# EAGLE board PCA9306_Breakout Panel v14 (EAGLE 6.4), part 1 of 3
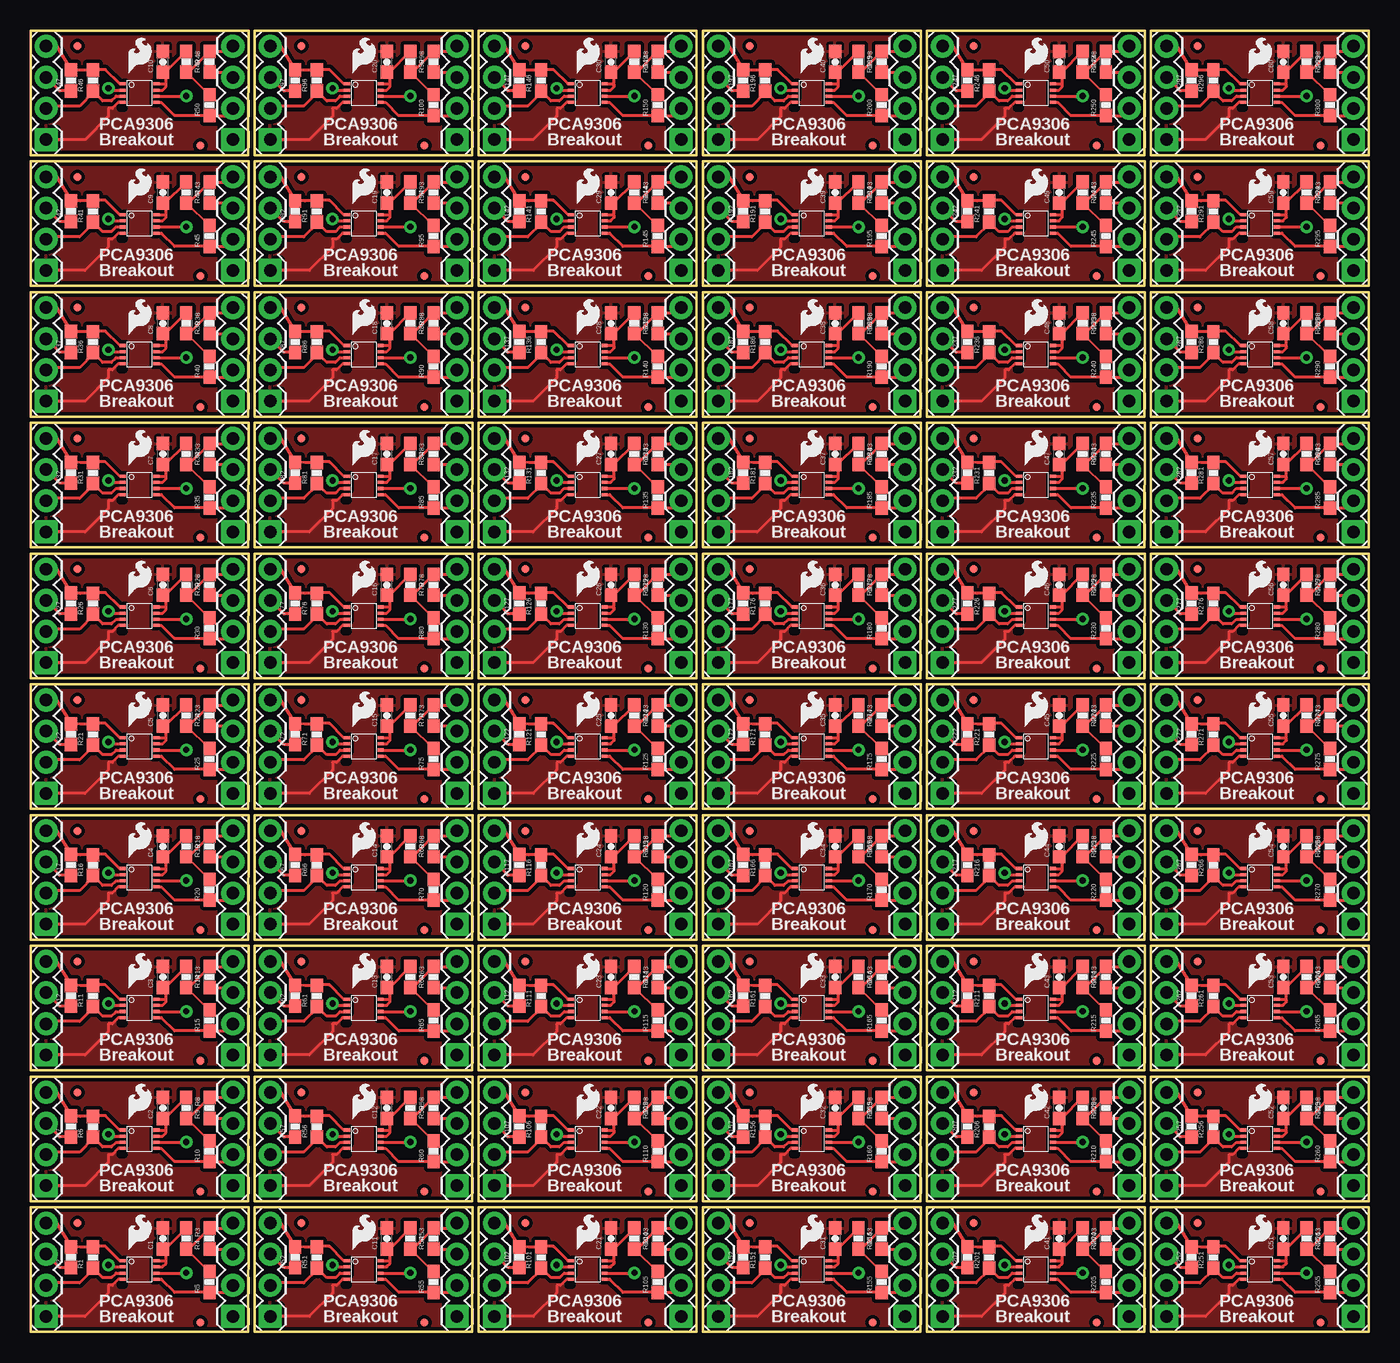
[diagram p0: board, top side]
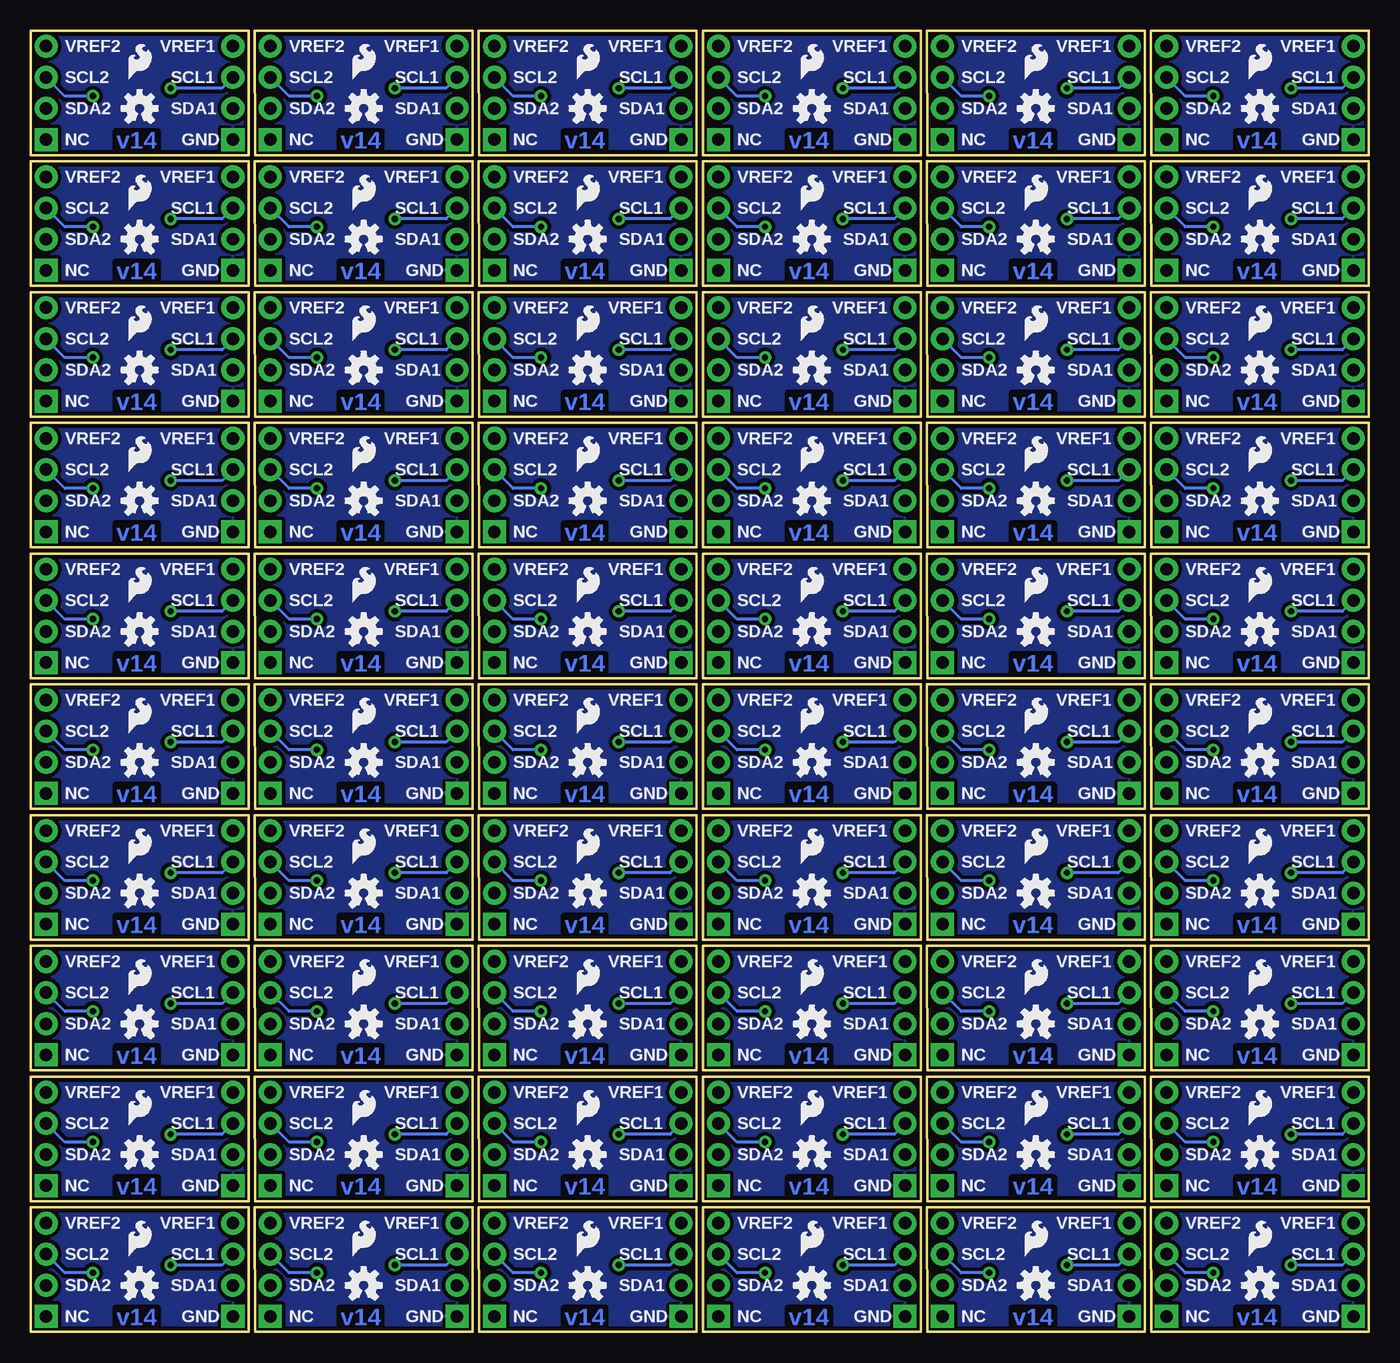
[diagram p1: board, bottom side, seen from below]

Size 109.22 x 106.17 mm. Coordinates in mm from the lower left corner, seen from the top.
Outline: 240 segments
Copper layers (1*16): Top 0.035mm / dielectric 1.5mm / Bottom 0.035mm
Design rules "SparkFun": minimum track width 8mil, minimum drill 20mil, track to track 8mil, track to pad 8mil, pad to pad 8mil, via to via 8mil, smd to smd 8mil, copper to edge 8mil, drill to drill 8mil, minimum pad ring 12mil, minimum via ring 10mil, stop-mask expansion 4mil, vias tented up to drill 20mil, thermal gap 10mil
tRestrict: area 7.3,3.8 to 7.6,4.1; area 7.3,14.5 to 7.6,14.8; area 7.3,25.1 to 7.6,25.5; area 7.3,35.8 to 7.6,36.1; area 7.3,46.5 to 7.6,46.8; area 7.3,57.2 to 7.6,57.5; area 7.3,67.8 to 7.6,68.1; area 7.3,78.5 to 7.6,78.8; area 7.3,89.2 to 7.6,89.5; area 7.3,99.8 to 7.6,100.1; area 25.6,3.8 to 25.9,4.1; area 25.6,14.5 to 25.9,14.8; 48 more areas

## Footprints (pad centres in the part's own frame; a part is rotated, then mirrored left to right if it is on the bottom)
0603-CAP = smd 1.1 x 1: 1 -0.85,0; 2 0.85,0
1X04 = drill 1.016 pad 1.88 square: 1 0,0 | drill 1.016 pad 1.88: 2 2.54,0; 3 5.08,0; 4 7.62,0
FIDUCIAL-1X2.5 = smd 0.635 x 0.635: 1 0,0
0603-RES = smd 1.1 x 1: 1 -0.85,0; 2 0.85,0
PSOP-8 = smd 0.25 x 0.5: 1 -0.73,-1.37; 2 -0.23,-1.37; 3 0.27,-1.37; 4 0.77,-1.37; 5 0.77,1.38; 6 0.27,1.38; 7 -0.23,1.38; 8 -0.73,1.38

## Placement (x,y rotation side)
C1  0.1uF  [0603-CAP]  10.79,7.62 90 top
C2  0.1uF  [0603-CAP]  10.79,18.29 90 top
C3  0.1uF  [0603-CAP]  10.79,28.96 90 top
C4  0.1uF  [0603-CAP]  10.79,39.62 90 top
C5  0.1uF  [0603-CAP]  10.79,50.29 90 top
C6  0.1uF  [0603-CAP]  10.79,60.96 90 top
C7  0.1uF  [0603-CAP]  10.79,71.63 90 top
C8  0.1uF  [0603-CAP]  10.79,82.3 90 top
C9  0.1uF  [0603-CAP]  10.79,92.96 90 top
C10  0.1uF  [0603-CAP]  10.79,103.63 90 top
C11  0.1uF  [0603-CAP]  29.08,7.62 90 top
C12  0.1uF  [0603-CAP]  29.08,18.29 90 top
C13  0.1uF  [0603-CAP]  29.08,28.96 90 top
C14  0.1uF  [0603-CAP]  29.08,39.62 90 top
C15  0.1uF  [0603-CAP]  29.08,50.29 90 top
C16  0.1uF  [0603-CAP]  29.08,60.96 90 top
C17  0.1uF  [0603-CAP]  29.08,71.63 90 top
C18  0.1uF  [0603-CAP]  29.08,82.3 90 top
C19  0.1uF  [0603-CAP]  29.08,92.96 90 top
C20  0.1uF  [0603-CAP]  29.08,103.63 90 top
C21  0.1uF  [0603-CAP]  47.37,7.62 90 top
C22  0.1uF  [0603-CAP]  47.37,18.29 90 top
C23  0.1uF  [0603-CAP]  47.37,28.96 90 top
C24  0.1uF  [0603-CAP]  47.37,39.62 90 top
C25  0.1uF  [0603-CAP]  47.37,50.29 90 top
C26  0.1uF  [0603-CAP]  47.37,60.96 90 top
C27  0.1uF  [0603-CAP]  47.37,71.63 90 top
C28  0.1uF  [0603-CAP]  47.37,82.3 90 top
C29  0.1uF  [0603-CAP]  47.37,92.96 90 top
C30  0.1uF  [0603-CAP]  47.37,103.63 90 top
C31  0.1uF  [0603-CAP]  65.66,7.62 90 top
C32  0.1uF  [0603-CAP]  65.66,18.29 90 top
C33  0.1uF  [0603-CAP]  65.66,28.96 90 top
C34  0.1uF  [0603-CAP]  65.66,39.62 90 top
C35  0.1uF  [0603-CAP]  65.66,50.29 90 top
C36  0.1uF  [0603-CAP]  65.66,60.96 90 top
C37  0.1uF  [0603-CAP]  65.66,71.63 90 top
C38  0.1uF  [0603-CAP]  65.66,82.3 90 top
C39  0.1uF  [0603-CAP]  65.66,92.96 90 top
C40  0.1uF  [0603-CAP]  65.66,103.63 90 top
C41  0.1uF  [0603-CAP]  83.95,7.62 90 top
C42  0.1uF  [0603-CAP]  83.95,18.29 90 top
C43  0.1uF  [0603-CAP]  83.95,28.96 90 top
C44  0.1uF  [0603-CAP]  83.95,39.62 90 top
C45  0.1uF  [0603-CAP]  83.95,50.29 90 top
C46  0.1uF  [0603-CAP]  83.95,60.96 90 top
C47  0.1uF  [0603-CAP]  83.95,71.63 90 top
C48  0.1uF  [0603-CAP]  83.95,82.3 90 top
C49  0.1uF  [0603-CAP]  83.95,92.96 90 top
C50  0.1uF  [0603-CAP]  83.95,103.63 90 top
C51  0.1uF  [0603-CAP]  102.23,7.62 90 top
C52  0.1uF  [0603-CAP]  102.23,18.29 90 top
C53  0.1uF  [0603-CAP]  102.23,28.96 90 top
C54  0.1uF  [0603-CAP]  102.23,39.62 90 top
C55  0.1uF  [0603-CAP]  102.23,50.29 90 top
C56  0.1uF  [0603-CAP]  102.23,60.96 90 top
C57  0.1uF  [0603-CAP]  102.23,71.63 90 top
C58  0.1uF  [0603-CAP]  102.23,82.3 90 top
C59  0.1uF  [0603-CAP]  102.23,92.96 90 top
C60  0.1uF  [0603-CAP]  102.23,103.63 90 top
JP1  [1X04]  1.27,1.27 90 top
JP2  [1X04]  16.51,1.27 90 top
JP3  LOGO-SFESK  [SFE-LOGO-FLAME]  8,6.73 0 top
JP4  LOGO-SFESK  [SFE-LOGO-FLAME]  9.78,6.22 0 bottom
JP5  [1X04]  1.27,11.94 90 top
JP6  [1X04]  16.51,11.94 90 top
JP7  FIDUCIAL1X2.5  [FIDUCIAL-1X2.5]  3.81,8.89 0 top
JP8  FIDUCIAL1X2.5  [FIDUCIAL-1X2.5]  13.84,0.79 0 top
JP9  LOGO-SFESK  [SFE-LOGO-FLAME]  8,17.4 0 top
JP10  LOGO-SFESK  [SFE-LOGO-FLAME]  9.78,16.89 0 bottom
JP11  FIDUCIAL1X2.5  [FIDUCIAL-1X2.5]  3.81,19.56 0 top
JP12  FIDUCIAL1X2.5  [FIDUCIAL-1X2.5]  13.84,11.46 0 top
JP13  [1X04]  1.27,22.61 90 top
JP14  [1X04]  16.51,22.61 90 top
JP15  LOGO-SFESK  [SFE-LOGO-FLAME]  8,28.07 0 top
JP16  LOGO-SFESK  [SFE-LOGO-FLAME]  9.78,27.56 0 bottom
JP17  FIDUCIAL1X2.5  [FIDUCIAL-1X2.5]  3.81,30.23 0 top
JP18  FIDUCIAL1X2.5  [FIDUCIAL-1X2.5]  13.84,22.13 0 top
JP19  [1X04]  1.27,33.27 90 top
JP20  [1X04]  16.51,33.27 90 top
JP21  LOGO-SFESK  [SFE-LOGO-FLAME]  8,38.73 0 top
JP22  LOGO-SFESK  [SFE-LOGO-FLAME]  9.78,38.23 0 bottom
JP23  FIDUCIAL1X2.5  [FIDUCIAL-1X2.5]  3.81,40.89 0 top
JP24  FIDUCIAL1X2.5  [FIDUCIAL-1X2.5]  13.84,32.8 0 top
JP25  [1X04]  1.27,43.94 90 top
JP26  [1X04]  16.51,43.94 90 top
JP27  LOGO-SFESK  [SFE-LOGO-FLAME]  8,49.4 0 top
JP28  LOGO-SFESK  [SFE-LOGO-FLAME]  9.78,48.9 0 bottom
JP29  FIDUCIAL1X2.5  [FIDUCIAL-1X2.5]  3.81,51.56 0 top
JP30  FIDUCIAL1X2.5  [FIDUCIAL-1X2.5]  13.84,43.47 0 top
JP31  [1X04]  1.27,54.61 90 top
JP32  [1X04]  16.51,54.61 90 top
JP33  LOGO-SFESK  [SFE-LOGO-FLAME]  8,60.07 0 top
JP34  LOGO-SFESK  [SFE-LOGO-FLAME]  9.78,59.56 0 bottom
JP35  FIDUCIAL1X2.5  [FIDUCIAL-1X2.5]  3.81,62.23 0 top
JP36  FIDUCIAL1X2.5  [FIDUCIAL-1X2.5]  13.84,54.13 0 top
JP37  [1X04]  1.27,65.28 90 top
JP38  [1X04]  16.51,65.28 90 top
JP39  LOGO-SFESK  [SFE-LOGO-FLAME]  8,70.74 0 top
JP40  LOGO-SFESK  [SFE-LOGO-FLAME]  9.78,70.23 0 bottom
JP41  FIDUCIAL1X2.5  [FIDUCIAL-1X2.5]  3.81,72.9 0 top
JP42  FIDUCIAL1X2.5  [FIDUCIAL-1X2.5]  13.84,64.8 0 top
JP43  [1X04]  1.27,75.95 90 top
JP44  [1X04]  16.51,75.95 90 top
JP45  LOGO-SFESK  [SFE-LOGO-FLAME]  8,81.41 0 top
JP46  LOGO-SFESK  [SFE-LOGO-FLAME]  9.78,80.9 0 bottom
JP47  FIDUCIAL1X2.5  [FIDUCIAL-1X2.5]  3.81,83.57 0 top
JP48  FIDUCIAL1X2.5  [FIDUCIAL-1X2.5]  13.84,75.47 0 top
JP49  [1X04]  1.27,86.61 90 top
JP50  [1X04]  16.51,86.61 90 top
JP51  LOGO-SFESK  [SFE-LOGO-FLAME]  8,92.08 0 top
JP52  LOGO-SFESK  [SFE-LOGO-FLAME]  9.78,91.57 0 bottom
JP53  FIDUCIAL1X2.5  [FIDUCIAL-1X2.5]  3.81,94.23 0 top
JP54  FIDUCIAL1X2.5  [FIDUCIAL-1X2.5]  13.84,86.14 0 top
JP55  [1X04]  1.27,97.28 90 top
JP56  [1X04]  16.51,97.28 90 top
JP57  LOGO-SFESK  [SFE-LOGO-FLAME]  8,102.74 0 top
JP58  LOGO-SFESK  [SFE-LOGO-FLAME]  9.78,102.23 0 bottom
JP59  FIDUCIAL1X2.5  [FIDUCIAL-1X2.5]  3.81,104.9 0 top
JP60  FIDUCIAL1X2.5  [FIDUCIAL-1X2.5]  13.84,96.81 0 top
JP61  [1X04]  19.56,1.27 90 top
JP62  [1X04]  34.8,1.27 90 top
JP63  LOGO-SFESK  [SFE-LOGO-FLAME]  26.29,6.73 0 top
JP64  LOGO-SFESK  [SFE-LOGO-FLAME]  28.07,6.22 0 bottom
JP65  FIDUCIAL1X2.5  [FIDUCIAL-1X2.5]  22.1,8.89 0 top
JP66  FIDUCIAL1X2.5  [FIDUCIAL-1X2.5]  32.13,0.79 0 top
JP67  [1X04]  19.56,11.94 90 top
JP68  [1X04]  34.8,11.94 90 top
JP69  LOGO-SFESK  [SFE-LOGO-FLAME]  26.29,17.4 0 top
JP70  LOGO-SFESK  [SFE-LOGO-FLAME]  28.07,16.89 0 bottom
JP71  FIDUCIAL1X2.5  [FIDUCIAL-1X2.5]  22.1,19.56 0 top
JP72  FIDUCIAL1X2.5  [FIDUCIAL-1X2.5]  32.13,11.46 0 top
JP73  [1X04]  19.56,22.61 90 top
JP74  [1X04]  34.8,22.61 90 top
JP75  LOGO-SFESK  [SFE-LOGO-FLAME]  26.29,28.07 0 top
JP76  LOGO-SFESK  [SFE-LOGO-FLAME]  28.07,27.56 0 bottom
JP77  FIDUCIAL1X2.5  [FIDUCIAL-1X2.5]  22.1,30.23 0 top
JP78  FIDUCIAL1X2.5  [FIDUCIAL-1X2.5]  32.13,22.13 0 top
JP79  [1X04]  19.56,33.27 90 top
JP80  [1X04]  34.8,33.27 90 top
JP81  LOGO-SFESK  [SFE-LOGO-FLAME]  26.29,38.73 0 top
JP82  LOGO-SFESK  [SFE-LOGO-FLAME]  28.07,38.23 0 bottom
JP83  FIDUCIAL1X2.5  [FIDUCIAL-1X2.5]  22.1,40.89 0 top
JP84  FIDUCIAL1X2.5  [FIDUCIAL-1X2.5]  32.13,32.8 0 top
JP85  [1X04]  19.56,43.94 90 top
JP86  [1X04]  34.8,43.94 90 top
JP87  LOGO-SFESK  [SFE-LOGO-FLAME]  26.29,49.4 0 top
JP88  LOGO-SFESK  [SFE-LOGO-FLAME]  28.07,48.9 0 bottom
JP89  FIDUCIAL1X2.5  [FIDUCIAL-1X2.5]  22.1,51.56 0 top
JP90  FIDUCIAL1X2.5  [FIDUCIAL-1X2.5]  32.13,43.47 0 top
JP91  [1X04]  19.56,54.61 90 top
JP92  [1X04]  34.8,54.61 90 top
JP93  LOGO-SFESK  [SFE-LOGO-FLAME]  26.29,60.07 0 top
JP94  LOGO-SFESK  [SFE-LOGO-FLAME]  28.07,59.56 0 bottom
JP95  FIDUCIAL1X2.5  [FIDUCIAL-1X2.5]  22.1,62.23 0 top
JP96  FIDUCIAL1X2.5  [FIDUCIAL-1X2.5]  32.13,54.13 0 top
JP97  [1X04]  19.56,65.28 90 top
JP98  [1X04]  34.8,65.28 90 top
JP99  LOGO-SFESK  [SFE-LOGO-FLAME]  26.29,70.74 0 top
JP100  LOGO-SFESK  [SFE-LOGO-FLAME]  28.07,70.23 0 bottom
JP101  FIDUCIAL1X2.5  [FIDUCIAL-1X2.5]  22.1,72.9 0 top
JP102  FIDUCIAL1X2.5  [FIDUCIAL-1X2.5]  32.13,64.8 0 top
JP103  [1X04]  19.56,75.95 90 top
JP104  [1X04]  34.8,75.95 90 top
JP105  LOGO-SFESK  [SFE-LOGO-FLAME]  26.29,81.41 0 top
JP106  LOGO-SFESK  [SFE-LOGO-FLAME]  28.07,80.9 0 bottom
JP107  FIDUCIAL1X2.5  [FIDUCIAL-1X2.5]  22.1,83.57 0 top
JP108  FIDUCIAL1X2.5  [FIDUCIAL-1X2.5]  32.13,75.47 0 top
JP109  [1X04]  19.56,86.61 90 top
JP110  [1X04]  34.8,86.61 90 top
JP111  LOGO-SFESK  [SFE-LOGO-FLAME]  26.29,92.08 0 top
JP112  LOGO-SFESK  [SFE-LOGO-FLAME]  28.07,91.57 0 bottom
JP113  FIDUCIAL1X2.5  [FIDUCIAL-1X2.5]  22.1,94.23 0 top
JP114  FIDUCIAL1X2.5  [FIDUCIAL-1X2.5]  32.13,86.14 0 top
JP115  [1X04]  19.56,97.28 90 top
JP116  [1X04]  34.8,97.28 90 top
JP117  LOGO-SFESK  [SFE-LOGO-FLAME]  26.29,102.74 0 top
JP118  LOGO-SFESK  [SFE-LOGO-FLAME]  28.07,102.23 0 bottom
JP119  FIDUCIAL1X2.5  [FIDUCIAL-1X2.5]  22.1,104.9 0 top
JP120  FIDUCIAL1X2.5  [FIDUCIAL-1X2.5]  32.13,96.81 0 top
JP121  [1X04]  37.85,1.27 90 top
JP122  [1X04]  53.09,1.27 90 top
JP123  LOGO-SFESK  [SFE-LOGO-FLAME]  44.58,6.73 0 top
JP124  LOGO-SFESK  [SFE-LOGO-FLAME]  46.35,6.22 0 bottom
JP125  FIDUCIAL1X2.5  [FIDUCIAL-1X2.5]  40.39,8.89 0 top
JP126  FIDUCIAL1X2.5  [FIDUCIAL-1X2.5]  50.42,0.79 0 top
JP127  [1X04]  37.85,11.94 90 top
JP128  [1X04]  53.09,11.94 90 top
JP129  LOGO-SFESK  [SFE-LOGO-FLAME]  44.58,17.4 0 top
JP130  LOGO-SFESK  [SFE-LOGO-FLAME]  46.35,16.89 0 bottom
JP131  FIDUCIAL1X2.5  [FIDUCIAL-1X2.5]  40.39,19.56 0 top
JP132  FIDUCIAL1X2.5  [FIDUCIAL-1X2.5]  50.42,11.46 0 top
JP133  [1X04]  37.85,22.61 90 top
JP134  [1X04]  53.09,22.61 90 top
JP135  LOGO-SFESK  [SFE-LOGO-FLAME]  44.58,28.07 0 top
JP136  LOGO-SFESK  [SFE-LOGO-FLAME]  46.35,27.56 0 bottom
JP137  FIDUCIAL1X2.5  [FIDUCIAL-1X2.5]  40.39,30.23 0 top
JP138  FIDUCIAL1X2.5  [FIDUCIAL-1X2.5]  50.42,22.13 0 top
JP139  [1X04]  37.85,33.27 90 top
JP140  [1X04]  53.09,33.27 90 top
JP141  LOGO-SFESK  [SFE-LOGO-FLAME]  44.58,38.73 0 top
JP142  LOGO-SFESK  [SFE-LOGO-FLAME]  46.35,38.23 0 bottom
JP143  FIDUCIAL1X2.5  [FIDUCIAL-1X2.5]  40.39,40.89 0 top
JP144  FIDUCIAL1X2.5  [FIDUCIAL-1X2.5]  50.42,32.8 0 top
JP145  [1X04]  37.85,43.94 90 top
JP146  [1X04]  53.09,43.94 90 top
JP147  LOGO-SFESK  [SFE-LOGO-FLAME]  44.58,49.4 0 top
JP148  LOGO-SFESK  [SFE-LOGO-FLAME]  46.35,48.9 0 bottom
JP149  FIDUCIAL1X2.5  [FIDUCIAL-1X2.5]  40.39,51.56 0 top
JP150  FIDUCIAL1X2.5  [FIDUCIAL-1X2.5]  50.42,43.47 0 top
JP151  [1X04]  37.85,54.61 90 top
JP152  [1X04]  53.09,54.61 90 top
JP153  LOGO-SFESK  [SFE-LOGO-FLAME]  44.58,60.07 0 top
JP154  LOGO-SFESK  [SFE-LOGO-FLAME]  46.35,59.56 0 bottom
JP155  FIDUCIAL1X2.5  [FIDUCIAL-1X2.5]  40.39,62.23 0 top
JP156  FIDUCIAL1X2.5  [FIDUCIAL-1X2.5]  50.42,54.13 0 top
JP157  [1X04]  37.85,65.28 90 top
JP158  [1X04]  53.09,65.28 90 top
JP159  LOGO-SFESK  [SFE-LOGO-FLAME]  44.58,70.74 0 top
JP160  LOGO-SFESK  [SFE-LOGO-FLAME]  46.35,70.23 0 bottom
JP161  FIDUCIAL1X2.5  [FIDUCIAL-1X2.5]  40.39,72.9 0 top
JP162  FIDUCIAL1X2.5  [FIDUCIAL-1X2.5]  50.42,64.8 0 top
JP163  [1X04]  37.85,75.95 90 top
JP164  [1X04]  53.09,75.95 90 top
JP165  LOGO-SFESK  [SFE-LOGO-FLAME]  44.58,81.41 0 top
JP166  LOGO-SFESK  [SFE-LOGO-FLAME]  46.35,80.9 0 bottom
JP167  FIDUCIAL1X2.5  [FIDUCIAL-1X2.5]  40.39,83.57 0 top
JP168  FIDUCIAL1X2.5  [FIDUCIAL-1X2.5]  50.42,75.47 0 top
JP169  [1X04]  37.85,86.61 90 top
JP170  [1X04]  53.09,86.61 90 top
JP171  LOGO-SFESK  [SFE-LOGO-FLAME]  44.58,92.08 0 top
JP172  LOGO-SFESK  [SFE-LOGO-FLAME]  46.35,91.57 0 bottom
JP173  FIDUCIAL1X2.5  [FIDUCIAL-1X2.5]  40.39,94.23 0 top
JP174  FIDUCIAL1X2.5  [FIDUCIAL-1X2.5]  50.42,86.14 0 top
JP175  [1X04]  37.85,97.28 90 top
JP176  [1X04]  53.09,97.28 90 top
JP177  LOGO-SFESK  [SFE-LOGO-FLAME]  44.58,102.74 0 top
JP178  LOGO-SFESK  [SFE-LOGO-FLAME]  46.35,102.23 0 bottom
JP179  FIDUCIAL1X2.5  [FIDUCIAL-1X2.5]  40.39,104.9 0 top
JP180  FIDUCIAL1X2.5  [FIDUCIAL-1X2.5]  50.42,96.81 0 top
JP181  [1X04]  56.13,1.27 90 top
JP182  [1X04]  71.37,1.27 90 top
JP183  LOGO-SFESK  [SFE-LOGO-FLAME]  62.87,6.73 0 top
JP184  LOGO-SFESK  [SFE-LOGO-FLAME]  64.64,6.22 0 bottom
JP185  FIDUCIAL1X2.5  [FIDUCIAL-1X2.5]  58.67,8.89 0 top
JP186  FIDUCIAL1X2.5  [FIDUCIAL-1X2.5]  68.71,0.79 0 top
JP187  [1X04]  56.13,11.94 90 top
JP188  [1X04]  71.37,11.94 90 top
JP189  LOGO-SFESK  [SFE-LOGO-FLAME]  62.87,17.4 0 top
JP190  LOGO-SFESK  [SFE-LOGO-FLAME]  64.64,16.89 0 bottom
JP191  FIDUCIAL1X2.5  [FIDUCIAL-1X2.5]  58.67,19.56 0 top
JP192  FIDUCIAL1X2.5  [FIDUCIAL-1X2.5]  68.71,11.46 0 top
JP193  [1X04]  56.13,22.61 90 top
JP194  [1X04]  71.37,22.61 90 top
JP195  LOGO-SFESK  [SFE-LOGO-FLAME]  62.87,28.07 0 top
JP196  LOGO-SFESK  [SFE-LOGO-FLAME]  64.64,27.56 0 bottom
JP197  FIDUCIAL1X2.5  [FIDUCIAL-1X2.5]  58.67,30.23 0 top
JP198  FIDUCIAL1X2.5  [FIDUCIAL-1X2.5]  68.71,22.13 0 top
JP199  [1X04]  56.13,33.27 90 top
JP200  [1X04]  71.37,33.27 90 top
JP201  LOGO-SFESK  [SFE-LOGO-FLAME]  62.87,38.73 0 top
JP202  LOGO-SFESK  [SFE-LOGO-FLAME]  64.64,38.23 0 bottom
JP203  FIDUCIAL1X2.5  [FIDUCIAL-1X2.5]  58.67,40.89 0 top
JP204  FIDUCIAL1X2.5  [FIDUCIAL-1X2.5]  68.71,32.8 0 top
JP205  [1X04]  56.13,43.94 90 top
JP206  [1X04]  71.37,43.94 90 top
JP207  LOGO-SFESK  [SFE-LOGO-FLAME]  62.87,49.4 0 top
JP208  LOGO-SFESK  [SFE-LOGO-FLAME]  64.64,48.9 0 bottom
JP209  FIDUCIAL1X2.5  [FIDUCIAL-1X2.5]  58.67,51.56 0 top
JP210  FIDUCIAL1X2.5  [FIDUCIAL-1X2.5]  68.71,43.47 0 top
JP211  [1X04]  56.13,54.61 90 top
JP212  [1X04]  71.37,54.61 90 top
JP213  LOGO-SFESK  [SFE-LOGO-FLAME]  62.87,60.07 0 top
JP214  LOGO-SFESK  [SFE-LOGO-FLAME]  64.64,59.56 0 bottom
JP215  FIDUCIAL1X2.5  [FIDUCIAL-1X2.5]  58.67,62.23 0 top
JP216  FIDUCIAL1X2.5  [FIDUCIAL-1X2.5]  68.71,54.13 0 top
JP217  [1X04]  56.13,65.28 90 top
JP218  [1X04]  71.37,65.28 90 top
JP219  LOGO-SFESK  [SFE-LOGO-FLAME]  62.87,70.74 0 top
JP220  LOGO-SFESK  [SFE-LOGO-FLAME]  64.64,70.23 0 bottom
JP221  FIDUCIAL1X2.5  [FIDUCIAL-1X2.5]  58.67,72.9 0 top
JP222  FIDUCIAL1X2.5  [FIDUCIAL-1X2.5]  68.71,64.8 0 top
JP223  [1X04]  56.13,75.95 90 top
JP224  [1X04]  71.37,75.95 90 top
JP225  LOGO-SFESK  [SFE-LOGO-FLAME]  62.87,81.41 0 top
JP226  LOGO-SFESK  [SFE-LOGO-FLAME]  64.64,80.9 0 bottom
JP227  FIDUCIAL1X2.5  [FIDUCIAL-1X2.5]  58.67,83.57 0 top
JP228  FIDUCIAL1X2.5  [FIDUCIAL-1X2.5]  68.71,75.47 0 top
JP229  [1X04]  56.13,86.61 90 top
JP230  [1X04]  71.37,86.61 90 top
JP231  LOGO-SFESK  [SFE-LOGO-FLAME]  62.87,92.08 0 top
JP232  LOGO-SFESK  [SFE-LOGO-FLAME]  64.64,91.57 0 bottom
JP233  FIDUCIAL1X2.5  [FIDUCIAL-1X2.5]  58.67,94.23 0 top
JP234  FIDUCIAL1X2.5  [FIDUCIAL-1X2.5]  68.71,86.14 0 top
JP235  [1X04]  56.13,97.28 90 top
JP236  [1X04]  71.37,97.28 90 top
JP237  LOGO-SFESK  [SFE-LOGO-FLAME]  62.87,102.74 0 top
JP238  LOGO-SFESK  [SFE-LOGO-FLAME]  64.64,102.23 0 bottom
JP239  FIDUCIAL1X2.5  [FIDUCIAL-1X2.5]  58.67,104.9 0 top
JP240  FIDUCIAL1X2.5  [FIDUCIAL-1X2.5]  68.71,96.81 0 top
JP241  [1X04]  74.42,1.27 90 top
JP242  [1X04]  89.66,1.27 90 top
JP243  LOGO-SFESK  [SFE-LOGO-FLAME]  81.15,6.73 0 top
JP244  LOGO-SFESK  [SFE-LOGO-FLAME]  82.93,6.22 0 bottom
JP245  FIDUCIAL1X2.5  [FIDUCIAL-1X2.5]  76.96,8.89 0 top
JP246  FIDUCIAL1X2.5  [FIDUCIAL-1X2.5]  87,0.79 0 top
JP247  [1X04]  74.42,11.94 90 top
JP248  [1X04]  89.66,11.94 90 top
JP249  LOGO-SFESK  [SFE-LOGO-FLAME]  81.15,17.4 0 top
JP250  LOGO-SFESK  [SFE-LOGO-FLAME]  82.93,16.89 0 bottom
JP251  FIDUCIAL1X2.5  [FIDUCIAL-1X2.5]  76.96,19.56 0 top
JP252  FIDUCIAL1X2.5  [FIDUCIAL-1X2.5]  87,11.46 0 top
JP253  [1X04]  74.42,22.61 90 top
JP254  [1X04]  89.66,22.61 90 top
JP255  LOGO-SFESK  [SFE-LOGO-FLAME]  81.15,28.07 0 top
JP256  LOGO-SFESK  [SFE-LOGO-FLAME]  82.93,27.56 0 bottom
JP257  FIDUCIAL1X2.5  [FIDUCIAL-1X2.5]  76.96,30.23 0 top
JP258  FIDUCIAL1X2.5  [FIDUCIAL-1X2.5]  87,22.13 0 top
JP259  [1X04]  74.42,33.27 90 top
JP260  [1X04]  89.66,33.27 90 top
JP261  LOGO-SFESK  [SFE-LOGO-FLAME]  81.15,38.73 0 top
JP262  LOGO-SFESK  [SFE-LOGO-FLAME]  82.93,38.23 0 bottom
JP263  FIDUCIAL1X2.5  [FIDUCIAL-1X2.5]  76.96,40.89 0 top
JP264  FIDUCIAL1X2.5  [FIDUCIAL-1X2.5]  87,32.8 0 top
JP265  [1X04]  74.42,43.94 90 top
JP266  [1X04]  89.66,43.94 90 top
JP267  LOGO-SFESK  [SFE-LOGO-FLAME]  81.15,49.4 0 top
JP268  LOGO-SFESK  [SFE-LOGO-FLAME]  82.93,48.9 0 bottom
JP269  FIDUCIAL1X2.5  [FIDUCIAL-1X2.5]  76.96,51.56 0 top
JP270  FIDUCIAL1X2.5  [FIDUCIAL-1X2.5]  87,43.47 0 top
JP271  [1X04]  74.42,54.61 90 top
JP272  [1X04]  89.66,54.61 90 top
JP273  LOGO-SFESK  [SFE-LOGO-FLAME]  81.15,60.07 0 top
JP274  LOGO-SFESK  [SFE-LOGO-FLAME]  82.93,59.56 0 bottom
JP275  FIDUCIAL1X2.5  [FIDUCIAL-1X2.5]  76.96,62.23 0 top
JP276  FIDUCIAL1X2.5  [FIDUCIAL-1X2.5]  87,54.13 0 top
JP277  [1X04]  74.42,65.28 90 top
JP278  [1X04]  89.66,65.28 90 top
JP279  LOGO-SFESK  [SFE-LOGO-FLAME]  81.15,70.74 0 top
JP280  LOGO-SFESK  [SFE-LOGO-FLAME]  82.93,70.23 0 bottom
JP281  FIDUCIAL1X2.5  [FIDUCIAL-1X2.5]  76.96,72.9 0 top
JP282  FIDUCIAL1X2.5  [FIDUCIAL-1X2.5]  87,64.8 0 top
JP283  [1X04]  74.42,75.95 90 top
JP284  [1X04]  89.66,75.95 90 top
JP285  LOGO-SFESK  [SFE-LOGO-FLAME]  81.15,81.41 0 top
JP286  LOGO-SFESK  [SFE-LOGO-FLAME]  82.93,80.9 0 bottom
JP287  FIDUCIAL1X2.5  [FIDUCIAL-1X2.5]  76.96,83.57 0 top
JP288  FIDUCIAL1X2.5  [FIDUCIAL-1X2.5]  87,75.47 0 top
JP289  [1X04]  74.42,86.61 90 top
JP290  [1X04]  89.66,86.61 90 top
JP291  LOGO-SFESK  [SFE-LOGO-FLAME]  81.15,92.08 0 top
JP292  LOGO-SFESK  [SFE-LOGO-FLAME]  82.93,91.57 0 bottom
JP293  FIDUCIAL1X2.5  [FIDUCIAL-1X2.5]  76.96,94.23 0 top
JP294  FIDUCIAL1X2.5  [FIDUCIAL-1X2.5]  87,86.14 0 top
JP295  [1X04]  74.42,97.28 90 top
JP296  [1X04]  89.66,97.28 90 top
JP297  LOGO-SFESK  [SFE-LOGO-FLAME]  81.15,102.74 0 top
JP298  LOGO-SFESK  [SFE-LOGO-FLAME]  82.93,102.23 0 bottom
JP299  FIDUCIAL1X2.5  [FIDUCIAL-1X2.5]  76.96,104.9 0 top
JP300  FIDUCIAL1X2.5  [FIDUCIAL-1X2.5]  87,96.81 0 top
JP301  [1X04]  92.71,1.27 90 top
JP302  [1X04]  107.95,1.27 90 top
JP303  LOGO-SFESK  [SFE-LOGO-FLAME]  99.44,6.73 0 top
JP304  LOGO-SFESK  [SFE-LOGO-FLAME]  101.22,6.22 0 bottom
JP305  FIDUCIAL1X2.5  [FIDUCIAL-1X2.5]  95.25,8.89 0 top
JP306  FIDUCIAL1X2.5  [FIDUCIAL-1X2.5]  105.28,0.79 0 top
JP307  [1X04]  92.71,11.94 90 top
JP308  [1X04]  107.95,11.94 90 top
JP309  LOGO-SFESK  [SFE-LOGO-FLAME]  99.44,17.4 0 top
JP310  LOGO-SFESK  [SFE-LOGO-FLAME]  101.22,16.89 0 bottom
JP311  FIDUCIAL1X2.5  [FIDUCIAL-1X2.5]  95.25,19.56 0 top
JP312  FIDUCIAL1X2.5  [FIDUCIAL-1X2.5]  105.28,11.46 0 top
JP313  [1X04]  92.71,22.61 90 top
JP314  [1X04]  107.95,22.61 90 top
JP315  LOGO-SFESK  [SFE-LOGO-FLAME]  99.44,28.07 0 top
JP316  LOGO-SFESK  [SFE-LOGO-FLAME]  101.22,27.56 0 bottom
JP317  FIDUCIAL1X2.5  [FIDUCIAL-1X2.5]  95.25,30.23 0 top
JP318  FIDUCIAL1X2.5  [FIDUCIAL-1X2.5]  105.28,22.13 0 top
JP319  [1X04]  92.71,33.27 90 top
JP320  [1X04]  107.95,33.27 90 top
JP321  LOGO-SFESK  [SFE-LOGO-FLAME]  99.44,38.73 0 top
JP322  LOGO-SFESK  [SFE-LOGO-FLAME]  101.22,38.23 0 bottom
JP323  FIDUCIAL1X2.5  [FIDUCIAL-1X2.5]  95.25,40.89 0 top
JP324  FIDUCIAL1X2.5  [FIDUCIAL-1X2.5]  105.28,32.8 0 top
JP325  [1X04]  92.71,43.94 90 top
JP326  [1X04]  107.95,43.94 90 top
JP327  LOGO-SFESK  [SFE-LOGO-FLAME]  99.44,49.4 0 top
JP328  LOGO-SFESK  [SFE-LOGO-FLAME]  101.22,48.9 0 bottom
JP329  FIDUCIAL1X2.5  [FIDUCIAL-1X2.5]  95.25,51.56 0 top
JP330  FIDUCIAL1X2.5  [FIDUCIAL-1X2.5]  105.28,43.47 0 top
JP331  [1X04]  92.71,54.61 90 top
JP332  [1X04]  107.95,54.61 90 top
JP333  LOGO-SFESK  [SFE-LOGO-FLAME]  99.44,60.07 0 top
JP334  LOGO-SFESK  [SFE-LOGO-FLAME]  101.22,59.56 0 bottom
JP335  FIDUCIAL1X2.5  [FIDUCIAL-1X2.5]  95.25,62.23 0 top
JP336  FIDUCIAL1X2.5  [FIDUCIAL-1X2.5]  105.28,54.13 0 top
JP337  [1X04]  92.71,65.28 90 top
JP338  [1X04]  107.95,65.28 90 top
JP339  LOGO-SFESK  [SFE-LOGO-FLAME]  99.44,70.74 0 top
JP340  LOGO-SFESK  [SFE-LOGO-FLAME]  101.22,70.23 0 bottom
JP341  FIDUCIAL1X2.5  [FIDUCIAL-1X2.5]  95.25,72.9 0 top
JP342  FIDUCIAL1X2.5  [FIDUCIAL-1X2.5]  105.28,64.8 0 top
JP343  [1X04]  92.71,75.95 90 top
JP344  [1X04]  107.95,75.95 90 top
JP345  LOGO-SFESK  [SFE-LOGO-FLAME]  99.44,81.41 0 top
JP346  LOGO-SFESK  [SFE-LOGO-FLAME]  101.22,80.9 0 bottom
JP347  FIDUCIAL1X2.5  [FIDUCIAL-1X2.5]  95.25,83.57 0 top
JP348  FIDUCIAL1X2.5  [FIDUCIAL-1X2.5]  105.28,75.47 0 top
JP349  [1X04]  92.71,86.61 90 top
JP350  [1X04]  107.95,86.61 90 top
JP351  LOGO-SFESK  [SFE-LOGO-FLAME]  99.44,92.08 0 top
JP352  LOGO-SFESK  [SFE-LOGO-FLAME]  101.22,91.57 0 bottom
JP353  FIDUCIAL1X2.5  [FIDUCIAL-1X2.5]  95.25,94.23 0 top
JP354  FIDUCIAL1X2.5  [FIDUCIAL-1X2.5]  105.28,86.14 0 top
JP355  [1X04]  92.71,97.28 90 top
JP356  [1X04]  107.95,97.28 90 top
JP357  LOGO-SFESK  [SFE-LOGO-FLAME]  99.44,102.74 0 top
JP358  LOGO-SFESK  [SFE-LOGO-FLAME]  101.22,102.23 0 bottom
JP359  FIDUCIAL1X2.5  [FIDUCIAL-1X2.5]  95.25,104.9 0 top
JP360  FIDUCIAL1X2.5  [FIDUCIAL-1X2.5]  105.28,96.81 0 top
LOGO1  OSHW-LOGOS  [OSHW-LOGO-S]  8.89,3.81 0 bottom
LOGO2  OSHW-LOGOS  [OSHW-LOGO-S]  8.89,14.48 0 bottom
LOGO3  OSHW-LOGOS  [OSHW-LOGO-S]  8.89,25.15 0 bottom
LOGO4  OSHW-LOGOS  [OSHW-LOGO-S]  8.89,35.81 0 bottom
LOGO5  OSHW-LOGOS  [OSHW-LOGO-S]  8.89,46.48 0 bottom
LOGO6  OSHW-LOGOS  [OSHW-LOGO-S]  8.89,57.15 0 bottom
LOGO7  OSHW-LOGOS  [OSHW-LOGO-S]  8.89,67.82 0 bottom
LOGO8  OSHW-LOGOS  [OSHW-LOGO-S]  8.89,78.49 0 bottom
LOGO9  OSHW-LOGOS  [OSHW-LOGO-S]  8.89,89.15 0 bottom
LOGO10  OSHW-LOGOS  [OSHW-LOGO-S]  8.89,99.82 0 bottom
LOGO11  OSHW-LOGOS  [OSHW-LOGO-S]  27.18,3.81 0 bottom
LOGO12  OSHW-LOGOS  [OSHW-LOGO-S]  27.18,14.48 0 bottom
LOGO13  OSHW-LOGOS  [OSHW-LOGO-S]  27.18,25.15 0 bottom
LOGO14  OSHW-LOGOS  [OSHW-LOGO-S]  27.18,35.81 0 bottom
LOGO15  OSHW-LOGOS  [OSHW-LOGO-S]  27.18,46.48 0 bottom
LOGO16  OSHW-LOGOS  [OSHW-LOGO-S]  27.18,57.15 0 bottom
LOGO17  OSHW-LOGOS  [OSHW-LOGO-S]  27.18,67.82 0 bottom
LOGO18  OSHW-LOGOS  [OSHW-LOGO-S]  27.18,78.49 0 bottom
LOGO19  OSHW-LOGOS  [OSHW-LOGO-S]  27.18,89.15 0 bottom
LOGO20  OSHW-LOGOS  [OSHW-LOGO-S]  27.18,99.82 0 bottom
LOGO21  OSHW-LOGOS  [OSHW-LOGO-S]  45.47,3.81 0 bottom
LOGO22  OSHW-LOGOS  [OSHW-LOGO-S]  45.47,14.48 0 bottom
LOGO23  OSHW-LOGOS  [OSHW-LOGO-S]  45.47,25.15 0 bottom
LOGO24  OSHW-LOGOS  [OSHW-LOGO-S]  45.47,35.81 0 bottom
LOGO25  OSHW-LOGOS  [OSHW-LOGO-S]  45.47,46.48 0 bottom
LOGO26  OSHW-LOGOS  [OSHW-LOGO-S]  45.47,57.15 0 bottom
LOGO27  OSHW-LOGOS  [OSHW-LOGO-S]  45.47,67.82 0 bottom
LOGO28  OSHW-LOGOS  [OSHW-LOGO-S]  45.47,78.49 0 bottom
LOGO29  OSHW-LOGOS  [OSHW-LOGO-S]  45.47,89.15 0 bottom
LOGO30  OSHW-LOGOS  [OSHW-LOGO-S]  45.47,99.82 0 bottom
LOGO31  OSHW-LOGOS  [OSHW-LOGO-S]  63.75,3.81 0 bottom
LOGO32  OSHW-LOGOS  [OSHW-LOGO-S]  63.75,14.48 0 bottom
LOGO33  OSHW-LOGOS  [OSHW-LOGO-S]  63.75,25.15 0 bottom
LOGO34  OSHW-LOGOS  [OSHW-LOGO-S]  63.75,35.81 0 bottom
LOGO35  OSHW-LOGOS  [OSHW-LOGO-S]  63.75,46.48 0 bottom
LOGO36  OSHW-LOGOS  [OSHW-LOGO-S]  63.75,57.15 0 bottom
LOGO37  OSHW-LOGOS  [OSHW-LOGO-S]  63.75,67.82 0 bottom
LOGO38  OSHW-LOGOS  [OSHW-LOGO-S]  63.75,78.49 0 bottom
LOGO39  OSHW-LOGOS  [OSHW-LOGO-S]  63.75,89.15 0 bottom
LOGO40  OSHW-LOGOS  [OSHW-LOGO-S]  63.75,99.82 0 bottom
LOGO41  OSHW-LOGOS  [OSHW-LOGO-S]  82.04,3.81 0 bottom
LOGO42  OSHW-LOGOS  [OSHW-LOGO-S]  82.04,14.48 0 bottom
LOGO43  OSHW-LOGOS  [OSHW-LOGO-S]  82.04,25.15 0 bottom
LOGO44  OSHW-LOGOS  [OSHW-LOGO-S]  82.04,35.81 0 bottom
LOGO45  OSHW-LOGOS  [OSHW-LOGO-S]  82.04,46.48 0 bottom
LOGO46  OSHW-LOGOS  [OSHW-LOGO-S]  82.04,57.15 0 bottom
LOGO47  OSHW-LOGOS  [OSHW-LOGO-S]  82.04,67.82 0 bottom
LOGO48  OSHW-LOGOS  [OSHW-LOGO-S]  82.04,78.49 0 bottom
LOGO49  OSHW-LOGOS  [OSHW-LOGO-S]  82.04,89.15 0 bottom
LOGO50  OSHW-LOGOS  [OSHW-LOGO-S]  82.04,99.82 0 bottom
LOGO51  OSHW-LOGOS  [OSHW-LOGO-S]  100.33,3.81 0 bottom
LOGO52  OSHW-LOGOS  [OSHW-LOGO-S]  100.33,14.48 0 bottom
LOGO53  OSHW-LOGOS  [OSHW-LOGO-S]  100.33,25.15 0 bottom
LOGO54  OSHW-LOGOS  [OSHW-LOGO-S]  100.33,35.81 0 bottom
LOGO55  OSHW-LOGOS  [OSHW-LOGO-S]  100.33,46.48 0 bottom
LOGO56  OSHW-LOGOS  [OSHW-LOGO-S]  100.33,57.15 0 bottom
LOGO57  OSHW-LOGOS  [OSHW-LOGO-S]  100.33,67.82 0 bottom
LOGO58  OSHW-LOGOS  [OSHW-LOGO-S]  100.33,78.49 0 bottom
LOGO59  OSHW-LOGOS  [OSHW-LOGO-S]  100.33,89.15 0 bottom
LOGO60  OSHW-LOGOS  [OSHW-LOGO-S]  100.33,99.82 0 bottom
R1  1k  [0603-RES]  5.08,6.08 90 top
R2  1k  [0603-RES]  3.3,6.1 90 top
R3  200k  [0603-RES]  12.7,7.62 270 top
R4  1k  [0603-RES]  14.61,7.62 90 top
R5  1k  [0603-RES]  14.61,4.08 90 top
R6  1k  [0603-RES]  5.08,16.75 90 top
R7  1k  [0603-RES]  3.3,16.76 90 top
R8  200k  [0603-RES]  12.7,18.29 270 top
R9  1k  [0603-RES]  14.61,18.29 90 top
R10  1k  [0603-RES]  14.61,14.75 90 top
R11  1k  [0603-RES]  5.08,27.42 90 top
R12  1k  [0603-RES]  3.3,27.43 90 top
R13  200k  [0603-RES]  12.7,28.96 270 top
R14  1k  [0603-RES]  14.61,28.96 90 top
R15  1k  [0603-RES]  14.61,25.42 90 top
R16  1k  [0603-RES]  5.08,38.08 90 top
R17  1k  [0603-RES]  3.3,38.1 90 top
R18  200k  [0603-RES]  12.7,39.62 270 top
R19  1k  [0603-RES]  14.61,39.62 90 top
R20  1k  [0603-RES]  14.61,36.08 90 top
R21  1k  [0603-RES]  5.08,48.75 90 top
R22  1k  [0603-RES]  3.3,48.77 90 top
R23  200k  [0603-RES]  12.7,50.29 270 top
R24  1k  [0603-RES]  14.61,50.29 90 top
R25  1k  [0603-RES]  14.61,46.75 90 top
R26  1k  [0603-RES]  5.08,59.42 90 top
R27  1k  [0603-RES]  3.3,59.44 90 top
R28  200k  [0603-RES]  12.7,60.96 270 top
R29  1k  [0603-RES]  14.61,60.96 90 top
R30  1k  [0603-RES]  14.61,57.42 90 top
R31  1k  [0603-RES]  5.08,70.09 90 top
R32  1k  [0603-RES]  3.3,70.1 90 top
R33  200k  [0603-RES]  12.7,71.63 270 top
R34  1k  [0603-RES]  14.61,71.63 90 top
R35  1k  [0603-RES]  14.61,68.09 90 top
R36  1k  [0603-RES]  5.08,80.76 90 top
R37  1k  [0603-RES]  3.3,80.77 90 top
R38  200k  [0603-RES]  12.7,82.3 270 top
R39  1k  [0603-RES]  14.61,82.3 90 top
R40  1k  [0603-RES]  14.61,78.76 90 top
R41  1k  [0603-RES]  5.08,91.42 90 top
R42  1k  [0603-RES]  3.3,91.44 90 top
R43  200k  [0603-RES]  12.7,92.96 270 top
R44  1k  [0603-RES]  14.61,92.96 90 top
R45  1k  [0603-RES]  14.61,89.42 90 top
R46  1k  [0603-RES]  5.08,102.09 90 top
R47  1k  [0603-RES]  3.3,102.11 90 top
R48  200k  [0603-RES]  12.7,103.63 270 top
R49  1k  [0603-RES]  14.61,103.63 90 top
R50  1k  [0603-RES]  14.61,100.09 90 top
R51  1k  [0603-RES]  23.37,6.08 90 top
R52  1k  [0603-RES]  21.59,6.1 90 top
R53  200k  [0603-RES]  30.99,7.62 270 top
R54  1k  [0603-RES]  32.89,7.62 90 top
R55  1k  [0603-RES]  32.89,4.08 90 top
R56  1k  [0603-RES]  23.37,16.75 90 top
R57  1k  [0603-RES]  21.59,16.76 90 top
R58  200k  [0603-RES]  30.99,18.29 270 top
R59  1k  [0603-RES]  32.89,18.29 90 top
R60  1k  [0603-RES]  32.89,14.75 90 top
R61  1k  [0603-RES]  23.37,27.42 90 top
R62  1k  [0603-RES]  21.59,27.43 90 top
R63  200k  [0603-RES]  30.99,28.96 270 top
R64  1k  [0603-RES]  32.89,28.96 90 top
R65  1k  [0603-RES]  32.89,25.42 90 top
R66  1k  [0603-RES]  23.37,38.08 90 top
R67  1k  [0603-RES]  21.59,38.1 90 top
R68  200k  [0603-RES]  30.99,39.62 270 top
R69  1k  [0603-RES]  32.89,39.62 90 top
R70  1k  [0603-RES]  32.89,36.08 90 top
R71  1k  [0603-RES]  23.37,48.75 90 top
R72  1k  [0603-RES]  21.59,48.77 90 top
R73  200k  [0603-RES]  30.99,50.29 270 top
R74  1k  [0603-RES]  32.89,50.29 90 top
R75  1k  [0603-RES]  32.89,46.75 90 top
R76  1k  [0603-RES]  23.37,59.42 90 top
R77  1k  [0603-RES]  21.59,59.44 90 top
R78  200k  [0603-RES]  30.99,60.96 270 top
R79  1k  [0603-RES]  32.89,60.96 90 top
R80  1k  [0603-RES]  32.89,57.42 90 top
R81  1k  [0603-RES]  23.37,70.09 90 top
R82  1k  [0603-RES]  21.59,70.1 90 top
R83  200k  [0603-RES]  30.99,71.63 270 top
R84  1k  [0603-RES]  32.89,71.63 90 top
R85  1k  [0603-RES]  32.89,68.09 90 top
R86  1k  [0603-RES]  23.37,80.76 90 top
R87  1k  [0603-RES]  21.59,80.77 90 top
R88  200k  [0603-RES]  30.99,82.3 270 top
R89  1k  [0603-RES]  32.89,82.3 90 top
R90  1k  [0603-RES]  32.89,78.76 90 top
R91  1k  [0603-RES]  23.37,91.42 90 top
R92  1k  [0603-RES]  21.59,91.44 90 top
R93  200k  [0603-RES]  30.99,92.96 270 top
R94  1k  [0603-RES]  32.89,92.96 90 top
R95  1k  [0603-RES]  32.89,89.42 90 top
R96  1k  [0603-RES]  23.37,102.09 90 top
R97  1k  [0603-RES]  21.59,102.11 90 top
R98  200k  [0603-RES]  30.99,103.63 270 top
R99  1k  [0603-RES]  32.89,103.63 90 top
R100  1k  [0603-RES]  32.89,100.09 90 top
R101  1k  [0603-RES]  41.66,6.08 90 top
R102  1k  [0603-RES]  39.88,6.1 90 top
R103  200k  [0603-RES]  49.28,7.62 270 top
R104  1k  [0603-RES]  51.18,7.62 90 top
R105  1k  [0603-RES]  51.18,4.08 90 top
R106  1k  [0603-RES]  41.66,16.75 90 top
R107  1k  [0603-RES]  39.88,16.76 90 top
R108  200k  [0603-RES]  49.28,18.29 270 top
R109  1k  [0603-RES]  51.18,18.29 90 top
R110  1k  [0603-RES]  51.18,14.75 90 top
R111  1k  [0603-RES]  41.66,27.42 90 top
R112  1k  [0603-RES]  39.88,27.43 90 top
R113  200k  [0603-RES]  49.28,28.96 270 top
R114  1k  [0603-RES]  51.18,28.96 90 top
R115  1k  [0603-RES]  51.18,25.42 90 top
R116  1k  [0603-RES]  41.66,38.08 90 top
R117  1k  [0603-RES]  39.88,38.1 90 top
R118  200k  [0603-RES]  49.28,39.62 270 top
R119  1k  [0603-RES]  51.18,39.62 90 top
R120  1k  [0603-RES]  51.18,36.08 90 top
R121  1k  [0603-RES]  41.66,48.75 90 top
R122  1k  [0603-RES]  39.88,48.77 90 top
R123  200k  [0603-RES]  49.28,50.29 270 top
R124  1k  [0603-RES]  51.18,50.29 90 top
R125  1k  [0603-RES]  51.18,46.75 90 top
R126  1k  [0603-RES]  41.66,59.42 90 top
R127  1k  [0603-RES]  39.88,59.44 90 top
R128  200k  [0603-RES]  49.28,60.96 270 top
R129  1k  [0603-RES]  51.18,60.96 90 top
R130  1k  [0603-RES]  51.18,57.42 90 top
R131  1k  [0603-RES]  41.66,70.09 90 top
R132  1k  [0603-RES]  39.88,70.1 90 top
R133  200k  [0603-RES]  49.28,71.63 270 top
R134  1k  [0603-RES]  51.18,71.63 90 top
R135  1k  [0603-RES]  51.18,68.09 90 top
R136  1k  [0603-RES]  41.66,80.76 90 top
R137  1k  [0603-RES]  39.88,80.77 90 top
R138  200k  [0603-RES]  49.28,82.3 270 top
R139  1k  [0603-RES]  51.18,82.3 90 top
R140  1k  [0603-RES]  51.18,78.76 90 top
R141  1k  [0603-RES]  41.66,91.42 90 top
R142  1k  [0603-RES]  39.88,91.44 90 top
R143  200k  [0603-RES]  49.28,92.96 270 top
R144  1k  [0603-RES]  51.18,92.96 90 top
R145  1k  [0603-RES]  51.18,89.42 90 top
R146  1k  [0603-RES]  41.66,102.09 90 top
R147  1k  [0603-RES]  39.88,102.11 90 top
R148  200k  [0603-RES]  49.28,103.63 270 top
R149  1k  [0603-RES]  51.18,103.63 90 top
R150  1k  [0603-RES]  51.18,100.09 90 top
R151  1k  [0603-RES]  59.94,6.08 90 top
R152  1k  [0603-RES]  58.17,6.1 90 top
R153  200k  [0603-RES]  67.56,7.62 270 top
R154  1k  [0603-RES]  69.47,7.62 90 top
R155  1k  [0603-RES]  69.47,4.08 90 top
R156  1k  [0603-RES]  59.94,16.75 90 top
R157  1k  [0603-RES]  58.17,16.76 90 top
R158  200k  [0603-RES]  67.56,18.29 270 top
R159  1k  [0603-RES]  69.47,18.29 90 top
R160  1k  [0603-RES]  69.47,14.75 90 top
R161  1k  [0603-RES]  59.94,27.42 90 top
R162  1k  [0603-RES]  58.17,27.43 90 top
R163  200k  [0603-RES]  67.56,28.96 270 top
R164  1k  [0603-RES]  69.47,28.96 90 top
R165  1k  [0603-RES]  69.47,25.42 90 top
R166  1k  [0603-RES]  59.94,38.08 90 top
R167  1k  [0603-RES]  58.17,38.1 90 top
R168  200k  [0603-RES]  67.56,39.62 270 top
R169  1k  [0603-RES]  69.47,39.62 90 top
R170  1k  [0603-RES]  69.47,36.08 90 top
R171  1k  [0603-RES]  59.94,48.75 90 top
R172  1k  [0603-RES]  58.17,48.77 90 top
R173  200k  [0603-RES]  67.56,50.29 270 top
R174  1k  [0603-RES]  69.47,50.29 90 top
R175  1k  [0603-RES]  69.47,46.75 90 top
R176  1k  [0603-RES]  59.94,59.42 90 top
R177  1k  [0603-RES]  58.17,59.44 90 top
R178  200k  [0603-RES]  67.56,60.96 270 top
R179  1k  [0603-RES]  69.47,60.96 90 top
R180  1k  [0603-RES]  69.47,57.42 90 top
R181  1k  [0603-RES]  59.94,70.09 90 top
R182  1k  [0603-RES]  58.17,70.1 90 top
R183  200k  [0603-RES]  67.56,71.63 270 top
R184  1k  [0603-RES]  69.47,71.63 90 top
R185  1k  [0603-RES]  69.47,68.09 90 top
R186  1k  [0603-RES]  59.94,80.76 90 top
R187  1k  [0603-RES]  58.17,80.77 90 top
R188  200k  [0603-RES]  67.56,82.3 270 top
R189  1k  [0603-RES]  69.47,82.3 90 top
R190  1k  [0603-RES]  69.47,78.76 90 top
R191  1k  [0603-RES]  59.94,91.42 90 top
R192  1k  [0603-RES]  58.17,91.44 90 top
R193  200k  [0603-RES]  67.56,92.96 270 top
R194  1k  [0603-RES]  69.47,92.96 90 top
R195  1k  [0603-RES]  69.47,89.42 90 top
R196  1k  [0603-RES]  59.94,102.09 90 top
R197  1k  [0603-RES]  58.17,102.11 90 top
R198  200k  [0603-RES]  67.56,103.63 270 top
R199  1k  [0603-RES]  69.47,103.63 90 top
R200  1k  [0603-RES]  69.47,100.09 90 top
R201  1k  [0603-RES]  78.23,6.08 90 top
R202  1k  [0603-RES]  76.45,6.1 90 top
R203  200k  [0603-RES]  85.85,7.62 270 top
R204  1k  [0603-RES]  87.76,7.62 90 top
R205  1k  [0603-RES]  87.76,4.08 90 top
R206  1k  [0603-RES]  78.23,16.75 90 top
R207  1k  [0603-RES]  76.45,16.76 90 top
R208  200k  [0603-RES]  85.85,18.29 270 top
R209  1k  [0603-RES]  87.76,18.29 90 top
R210  1k  [0603-RES]  87.76,14.75 90 top
R211  1k  [0603-RES]  78.23,27.42 90 top
R212  1k  [0603-RES]  76.45,27.43 90 top
R213  200k  [0603-RES]  85.85,28.96 270 top
R214  1k  [0603-RES]  87.76,28.96 90 top
R215  1k  [0603-RES]  87.76,25.42 90 top
R216  1k  [0603-RES]  78.23,38.08 90 top
R217  1k  [0603-RES]  76.45,38.1 90 top
R218  200k  [0603-RES]  85.85,39.62 270 top
R219  1k  [0603-RES]  87.76,39.62 90 top
R220  1k  [0603-RES]  87.76,36.08 90 top
R221  1k  [0603-RES]  78.23,48.75 90 top
R222  1k  [0603-RES]  76.45,48.77 90 top
R223  200k  [0603-RES]  85.85,50.29 270 top
R224  1k  [0603-RES]  87.76,50.29 90 top
R225  1k  [0603-RES]  87.76,46.75 90 top
R226  1k  [0603-RES]  78.23,59.42 90 top
R227  1k  [0603-RES]  76.45,59.44 90 top
R228  200k  [0603-RES]  85.85,60.96 270 top
R229  1k  [0603-RES]  87.76,60.96 90 top
R230  1k  [0603-RES]  87.76,57.42 90 top
R231  1k  [0603-RES]  78.23,70.09 90 top
R232  1k  [0603-RES]  76.45,70.1 90 top
R233  200k  [0603-RES]  85.85,71.63 270 top
R234  1k  [0603-RES]  87.76,71.63 90 top
R235  1k  [0603-RES]  87.76,68.09 90 top
R236  1k  [0603-RES]  78.23,80.76 90 top
R237  1k  [0603-RES]  76.45,80.77 90 top
R238  200k  [0603-RES]  85.85,82.3 270 top
R239  1k  [0603-RES]  87.76,82.3 90 top
R240  1k  [0603-RES]  87.76,78.76 90 top
R241  1k  [0603-RES]  78.23,91.42 90 top
R242  1k  [0603-RES]  76.45,91.44 90 top
R243  200k  [0603-RES]  85.85,92.96 270 top
R244  1k  [0603-RES]  87.76,92.96 90 top
R245  1k  [0603-RES]  87.76,89.42 90 top
R246  1k  [0603-RES]  78.23,102.09 90 top
R247  1k  [0603-RES]  76.45,102.11 90 top
R248  200k  [0603-RES]  85.85,103.63 270 top
R249  1k  [0603-RES]  87.76,103.63 90 top
R250  1k  [0603-RES]  87.76,100.09 90 top
R251  1k  [0603-RES]  96.52,6.08 90 top
R252  1k  [0603-RES]  94.74,6.1 90 top
R253  200k  [0603-RES]  104.14,7.62 270 top
R254  1k  [0603-RES]  106.05,7.62 90 top
R255  1k  [0603-RES]  106.05,4.08 90 top
R256  1k  [0603-RES]  96.52,16.75 90 top
R257  1k  [0603-RES]  94.74,16.76 90 top
R258  200k  [0603-RES]  104.14,18.29 270 top
R259  1k  [0603-RES]  106.05,18.29 90 top
R260  1k  [0603-RES]  106.05,14.75 90 top
R261  1k  [0603-RES]  96.52,27.42 90 top
R262  1k  [0603-RES]  94.74,27.43 90 top
R263  200k  [0603-RES]  104.14,28.96 270 top
R264  1k  [0603-RES]  106.05,28.96 90 top
R265  1k  [0603-RES]  106.05,25.42 90 top
R266  1k  [0603-RES]  96.52,38.08 90 top
R267  1k  [0603-RES]  94.74,38.1 90 top
R268  200k  [0603-RES]  104.14,39.62 270 top
R269  1k  [0603-RES]  106.05,39.62 90 top
R270  1k  [0603-RES]  106.05,36.08 90 top
R271  1k  [0603-RES]  96.52,48.75 90 top
R272  1k  [0603-RES]  94.74,48.77 90 top
R273  200k  [0603-RES]  104.14,50.29 270 top
R274  1k  [0603-RES]  106.05,50.29 90 top
R275  1k  [0603-RES]  106.05,46.75 90 top
R276  1k  [0603-RES]  96.52,59.42 90 top
R277  1k  [0603-RES]  94.74,59.44 90 top
R278  200k  [0603-RES]  104.14,60.96 270 top
R279  1k  [0603-RES]  106.05,60.96 90 top
R280  1k  [0603-RES]  106.05,57.42 90 top
R281  1k  [0603-RES]  96.52,70.09 90 top
R282  1k  [0603-RES]  94.74,70.1 90 top
R283  200k  [0603-RES]  104.14,71.63 270 top
R284  1k  [0603-RES]  106.05,71.63 90 top
R285  1k  [0603-RES]  106.05,68.09 90 top
R286  1k  [0603-RES]  96.52,80.76 90 top
R287  1k  [0603-RES]  94.74,80.77 90 top
R288  200k  [0603-RES]  104.14,82.3 270 top
R289  1k  [0603-RES]  106.05,82.3 90 top
R290  1k  [0603-RES]  106.05,78.76 90 top
R291  1k  [0603-RES]  96.52,91.42 90 top
R292  1k  [0603-RES]  94.74,91.44 90 top
R293  200k  [0603-RES]  104.14,92.96 270 top
R294  1k  [0603-RES]  106.05,92.96 90 top
R295  1k  [0603-RES]  106.05,89.42 90 top
R296  1k  [0603-RES]  96.52,102.09 90 top
R297  1k  [0603-RES]  94.74,102.11 90 top
R298  200k  [0603-RES]  104.14,103.63 270 top
R299  1k  [0603-RES]  106.05,103.63 90 top
R300  1k  [0603-RES]  106.05,100.09 90 top
U$1  PCA9306  [PSOP-8]  8.89,5.08 270 top
U$2  PCA9306  [PSOP-8]  8.89,15.75 270 top
U$3  PCA9306  [PSOP-8]  8.89,26.42 270 top
U$4  PCA9306  [PSOP-8]  8.89,37.08 270 top
U$5  PCA9306  [PSOP-8]  8.89,47.75 270 top
U$6  PCA9306  [PSOP-8]  8.89,58.42 270 top
U$7  PCA9306  [PSOP-8]  8.89,69.09 270 top
U$8  PCA9306  [PSOP-8]  8.89,79.76 270 top
U$9  PCA9306  [PSOP-8]  8.89,90.42 270 top
U$10  PCA9306  [PSOP-8]  8.89,101.09 270 top
U$11  PCA9306  [PSOP-8]  27.18,5.08 270 top
U$12  PCA9306  [PSOP-8]  27.18,15.75 270 top
U$13  PCA9306  [PSOP-8]  27.18,26.42 270 top
U$14  PCA9306  [PSOP-8]  27.18,37.08 270 top
U$15  PCA9306  [PSOP-8]  27.18,47.75 270 top
U$16  PCA9306  [PSOP-8]  27.18,58.42 270 top
U$17  PCA9306  [PSOP-8]  27.18,69.09 270 top
U$18  PCA9306  [PSOP-8]  27.18,79.76 270 top
U$19  PCA9306  [PSOP-8]  27.18,90.42 270 top
U$20  PCA9306  [PSOP-8]  27.18,101.09 270 top
U$21  PCA9306  [PSOP-8]  45.47,5.08 270 top
U$22  PCA9306  [PSOP-8]  45.47,15.75 270 top
U$23  PCA9306  [PSOP-8]  45.47,26.42 270 top
U$24  PCA9306  [PSOP-8]  45.47,37.08 270 top
U$25  PCA9306  [PSOP-8]  45.47,47.75 270 top
U$26  PCA9306  [PSOP-8]  45.47,58.42 270 top
U$27  PCA9306  [PSOP-8]  45.47,69.09 270 top
U$28  PCA9306  [PSOP-8]  45.47,79.76 270 top
U$29  PCA9306  [PSOP-8]  45.47,90.42 270 top
U$30  PCA9306  [PSOP-8]  45.47,101.09 270 top
U$31  PCA9306  [PSOP-8]  63.75,5.08 270 top
U$32  PCA9306  [PSOP-8]  63.75,15.75 270 top
U$33  PCA9306  [PSOP-8]  63.75,26.42 270 top
U$34  PCA9306  [PSOP-8]  63.75,37.08 270 top
U$35  PCA9306  [PSOP-8]  63.75,47.75 270 top
U$36  PCA9306  [PSOP-8]  63.75,58.42 270 top
U$37  PCA9306  [PSOP-8]  63.75,69.09 270 top
U$38  PCA9306  [PSOP-8]  63.75,79.76 270 top
U$39  PCA9306  [PSOP-8]  63.75,90.42 270 top
U$40  PCA9306  [PSOP-8]  63.75,101.09 270 top
U$41  PCA9306  [PSOP-8]  82.04,5.08 270 top
U$42  PCA9306  [PSOP-8]  82.04,15.75 270 top
U$43  PCA9306  [PSOP-8]  82.04,26.42 270 top
U$44  PCA9306  [PSOP-8]  82.04,37.08 270 top
U$45  PCA9306  [PSOP-8]  82.04,47.75 270 top
U$46  PCA9306  [PSOP-8]  82.04,58.42 270 top
U$47  PCA9306  [PSOP-8]  82.04,69.09 270 top
U$48  PCA9306  [PSOP-8]  82.04,79.76 270 top
U$49  PCA9306  [PSOP-8]  82.04,90.42 270 top
U$50  PCA9306  [PSOP-8]  82.04,101.09 270 top
U$51  PCA9306  [PSOP-8]  100.33,5.08 270 top
U$52  PCA9306  [PSOP-8]  100.33,15.75 270 top
U$53  PCA9306  [PSOP-8]  100.33,26.42 270 top
U$54  PCA9306  [PSOP-8]  100.33,37.08 270 top
U$55  PCA9306  [PSOP-8]  100.33,47.75 270 top
U$56  PCA9306  [PSOP-8]  100.33,58.42 270 top
U$57  PCA9306  [PSOP-8]  100.33,69.09 270 top
U$58  PCA9306  [PSOP-8]  100.33,79.76 270 top
U$59  PCA9306  [PSOP-8]  100.33,90.42 270 top
U$60  PCA9306  [PSOP-8]  100.33,101.09 270 top

## Library data of the parts
C1-C60 JP1-JP6 JP9 JP10 JP13-JP16 JP19-JP22 JP25-JP28 JP31-JP34 JP37-JP40 JP43-JP46 JP49-JP52 JP55-JP58 JP61-JP64 JP67-JP70 JP73-JP76 JP79-JP82 JP85-JP88 JP91-JP94 JP97-JP100 JP103-JP106 JP109-JP112 JP115-JP118 JP121-JP124 JP127-JP130 JP133-JP136 JP139-JP142 JP145-JP148 JP151-JP154 JP157-JP160 JP163-JP166 JP169-JP172 JP175-JP178 JP181-JP184 JP187-JP190 JP193-JP196 JP199-JP202 JP205-JP208 JP211-JP214 JP217-JP220 JP223-JP226 JP229-JP232 JP235-JP238 JP241-JP244 JP247-JP250 JP253-JP256 JP259-JP262 JP265-JP268 JP271-JP274 JP277-JP280 JP283-JP286 JP289-JP292 JP295-JP298 JP301-JP304 JP307-JP310 JP313-JP316 JP319-JP322 JP325-JP328 JP331-JP334 JP337-JP340 JP343-JP346 JP349-JP352 JP355-JP358 R1-R300 = SparkFun
JP7 JP8 JP11 JP12 JP17 JP18 JP23 JP24 JP29 JP30 JP35 JP36 JP41 JP42 JP47 JP48 JP53 JP54 JP59 JP60 JP65 JP66 JP71 JP72 JP77 JP78 JP83 JP84 JP89 JP90 JP95 JP96 JP101 JP102 JP107 JP108 JP113 JP114 JP119 JP120 JP125 JP126 JP131 JP132 JP137 JP138 JP143 JP144 JP149 JP150 JP155 JP156 JP161 JP162 JP167 JP168 JP173 JP174 JP179 JP180 JP185 JP186 JP191 JP192 JP197 JP198 JP203 JP204 JP209 JP210 JP215 JP216 JP221 JP222 JP227 JP228 JP233 JP234 JP239 JP240 JP245 JP246 JP251 JP252 JP257 JP258 JP263 JP264 JP269 JP270 JP275 JP276 JP281 JP282 JP287 JP288 JP293 JP294 JP299 JP300 JP305 JP306 JP311 JP312 JP317 JP318 JP323 JP324 JP329 JP330 JP335 JP336 JP341 JP342 JP347 JP348 JP353 JP354 JP359 JP360 = abes
LOGO1-LOGO60 = SparkFun-Aesthetics
U$1-U$60 = miscellany